# EAGLE board ONLY_HBRIDGE_v7 (EAGLE 9.7.0)
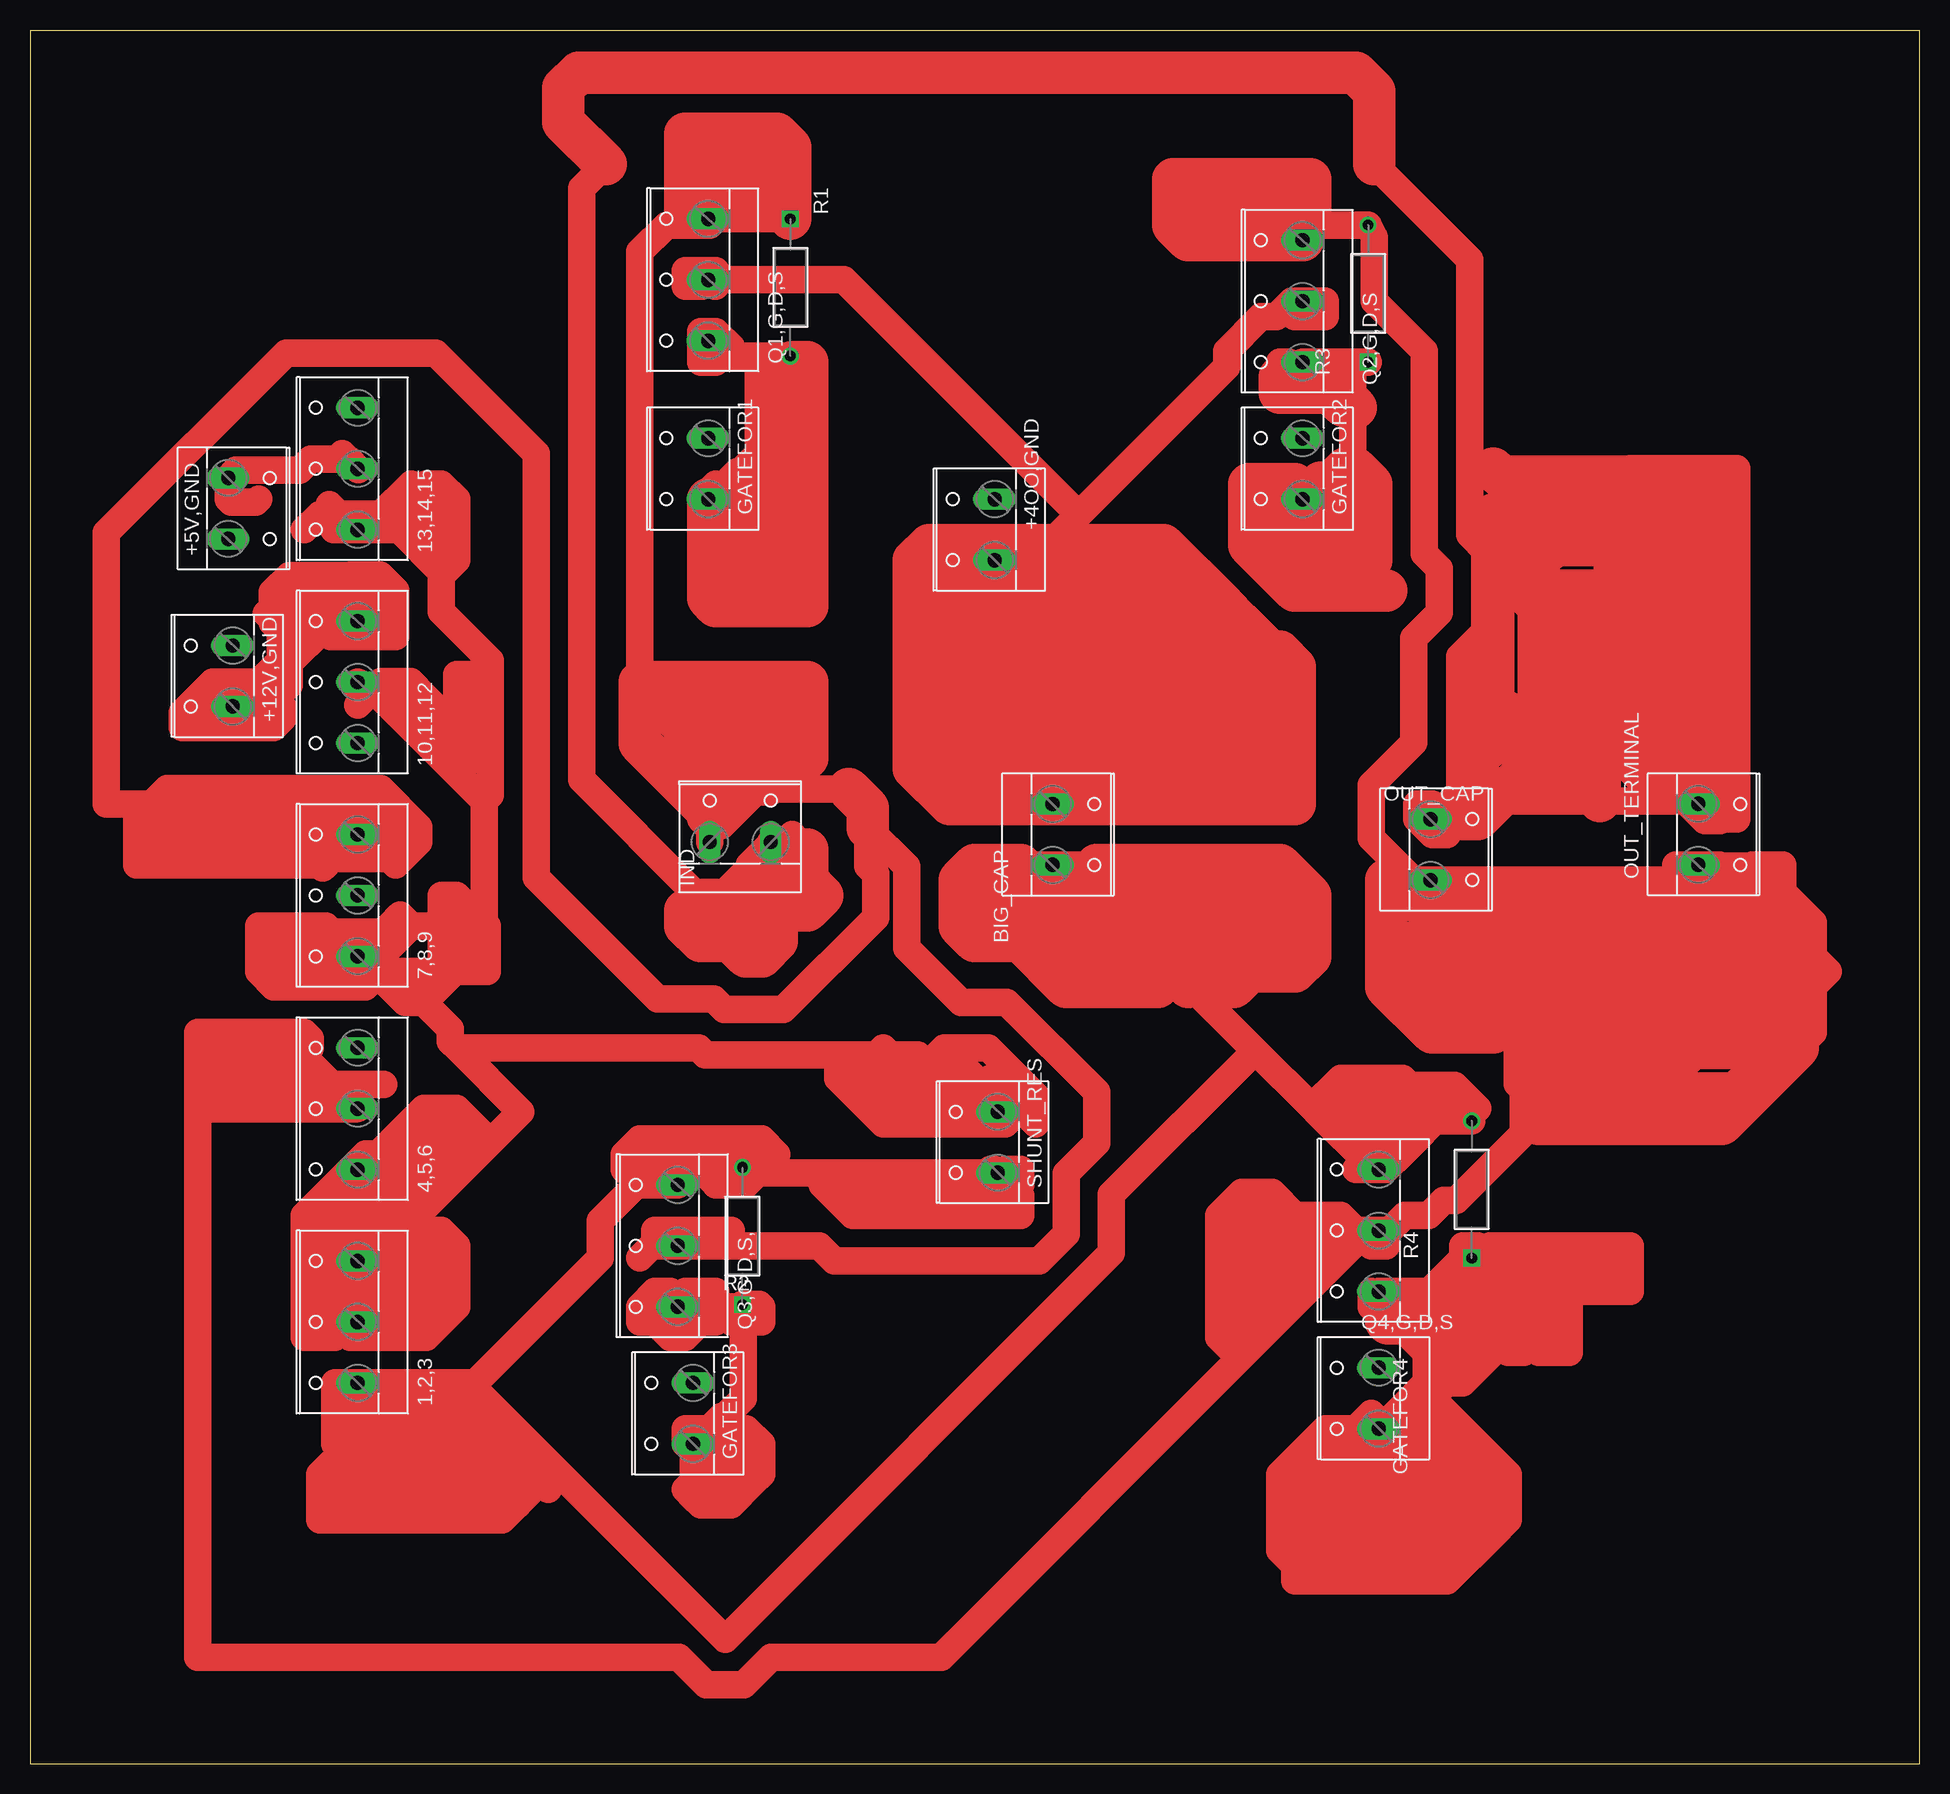
[diagram p0: board, top side]

Size 157.46 x 144.45 mm. Coordinates in mm from the lower left corner, seen from the top.
Outline: 0,0 157.46,0 157.46,144.45 0,144.45 0,0
Copper layers (1*16): Top 0.035mm / dielectric 1.5mm / Bottom 0.035mm
Design rules "Fusion Electronics Design Rules": minimum track width 90mil, minimum drill 0.35mm, track to track 0.5mm, track to pad 40mil, pad to pad 6mil, via to via 6mil, smd to smd 6mil, copper to edge 40mil, drill to drill 6mil, minimum pad ring 10mil, minimum via ring 8mil, stop-mask expansion 4mil, vias tented up to drill 9999mil, thermal gap 10mil

## Footprints (pad centres in the part's own frame; a part is rotated, then mirrored left to right if it is on the bottom)
W237-133 = drill 1.194 long: 1 -5.08,-0.635; 2 0,-0.635; 3 5.08,-0.635
W237-132 = drill 1.194 long: 1 -2.54,-0.635; 2 2.54,-0.635
STA_CF14_STP = drill 0.889 pad 1.397 square: 1 0,0 | drill 0.889 pad 1.397: 2 11.43,0

## Placement (x,y rotation side)
1,2,3  [W237-133]  26.67,36.83 90 top
4,5,6  [W237-133]  26.67,54.61 90 top
7,8,9  [W237-133]  26.67,72.39 90 top
10,11,12  [W237-133]  26.67,90.17 90 top
13,14,15  [W237-133]  26.67,107.95 90 top
+4OO,GND  [W237-132]  79.76,102.87 90 top
+5V,GND  [W237-132]  17.15,104.65 270 top
+12V,GND  [W237-132]  16.26,90.68 90 top
BIG_CAP  [W237-132]  85.85,77.47 270 top
GATEFOR1  [W237-132]  55.88,107.95 90 top
GATEFOR2  [W237-132]  105.41,107.95 90 top
GATEFOR3  [W237-132]  54.62,29.21 90 top
GATEFOR4  [W237-132]  111.76,30.48 90 top
IND  [W237-132]  59.18,77.47 0 top
OUT_CAP  [W237-132]  117.35,76.2 270 top
OUT_TERMINAL  [W237-132]  139.66,77.48 270 top
Q1,G,D,S  [W237-133]  55.88,123.7 90 top
Q2,G,D,S  [W237-133]  105.41,121.92 90 top
Q3,G,D,S,  [W237-133]  53.34,43.18 90 top
Q4,G,D,S  [W237-133]  111.76,44.45 90 top
R1  CF14JT10K0STA_CF14_STP  [STA_CF14_STP]  63.36,128.78 270 top
R2  CF14JT10K0STA_CF14_STP  [STA_CF14_STP]  59.37,38.28 90 top
R3  CF14JT10K0STA_CF14_STP  [STA_CF14_STP]  111.51,116.84 90 top
R4  CF14JT10K0STA_CF14_STP  [STA_CF14_STP]  120.14,42.16 90 top
SHUNT_RES  [W237-132]  80.01,51.82 90 top

## Library data of the parts
1,2,3 4,5,6 7,8,9 10,11,12 13,14,15 +4OO,GND +5V,GND +12V,GND BIG_CAP GATEFOR1-GATEFOR4 IND OUT_CAP OUT_TERMINAL Q1,G,D,S Q2,G,D,S Q3,G,D,S, Q4,G,D,S SHUNT_RES = con-wago-508
R1-R4 = 2024-12-04_14-13-54_Library; COPYRIGHT: Copyright (C) 2024 Ultra Librarian. All rights reserved.; MANUFACTURER_PART_NUMBER: CF14JT10K0; MFR_NAME: Stackpole International

## Nets
N$2: GATEFOR2.1 Q2,G,D,S.1 R3.1
N$3: 1,2,3.2 4,5,6.1 7,8,9.1 10,11,12.2 13,14,15.1 SHUNT_RES.2
N$5: GATEFOR3.1 Q3,G,D,S,.1 R2.1
N$6: 1,2,3.1 BIG_CAP.2 Q3,G,D,S,.3 Q4,G,D,S.3 R2.2 R4.2 SHUNT_RES.1
N$7: 13,14,15.2 +5V,GND.1
N$8: 10,11,12.3 +12V,GND.1
N$9: +4OO,GND.1 BIG_CAP.1 Q1,G,D,S.2 Q2,G,D,S.2
N$11: IND.2 OUT_CAP.1 OUT_TERMINAL.1
N$12: 4,5,6.2 OUT_CAP.2 OUT_TERMINAL.2 Q2,G,D,S.3 Q4,G,D,S.2 R3.2
N$13: GATEFOR1.1 Q1,G,D,S.1 R1.2
N$17: 7,8,9.3 IND.1 Q1,G,D,S.3 Q3,G,D,S,.2 R1.1
N$19: GATEFOR4.1 Q4,G,D,S.1 R4.1

## Tracks (layer width: path | path; a pad name or v marks a point on that pad's centre or on a via)
N$2
  Top 2.286: 110.24,116.84 Q2,G,D,S.1 106.68,116.2 106.68,115.57 105.41,115.57 104.77,116.2 104.14,116.84 104.77,116.84 | 110.24,116.84 R3.1 | 110.24,116.84 110.24,109.22 108.71,107.7 108.46,107.7 106.17,105.41 GATEFOR2.1 | 106.68,104.14 105.41,104.14 105.41,106.68
  Top 3.556: 106.68,104.14 106.68,100.33 107.95,99.06 110.49,99.06 111.76,100.33 111.76,106.68 110.49,107.95 109.62,107.95 108.47,106.8 107.56,106.8 106.17,105.41 | 105.41,106.68 101.6,106.68 101.6,101.6 104.14,99.06 | 104.14,99.06 105.41,100.33 105.41,101.6 104.14,102.87 104.14,104.14 105.41,105.41 110.49,105.41 110.49,101.6 109.22,100.33 107.95,100.33 107.95,102.87 | 104.14,99.06 105.41,97.79 113.03,97.79 | 104.77,116.2 104.14,115.57 104.14,114.3 108.35,114.3 109.42,113.23 109.85,113.67 110.49,113.03
N$3
  Top 2.286: 38.35,91.95 37.85,92.46 | 29.72,39.12 27.43,36.83 1,2,3.2 27.94,36.83 27.94,35.56 | 29.72,39.12 29.97,39.12 31.5,40.64 31.5,45.47 | 27.69,49.28 27.43,49.53 4,5,6.1 | 27.69,49.28 31.5,45.47 | 31.5,45.47 32.51,45.97 40.89,54.36 35.58,59.67 | 30.73,64.01 28.96,65.79 | 28.96,65.79 27.43,67.31 | 29.84,88.27 28.45,89.66 10,11,12.2 27.3,89.54 27.94,88.9 | 29.84,88.27 35.56,82.55 | 35.56,82.55 37.85,80.26 | 31.5,66.04 31.5,64.77 30.73,64.01 | 37.85,80.26 37.85,66.04 31.5,66.04 | 27.94,88.9 27.3,88.27 | 27.43,67.31 7,8,9.1 26.04,66.04 21.59,66.04 | 27.94,67.31 27.43,67.31 | 27.94,67.31 27.94,68.58 26.67,68.58 25.4,67.31 26.67,67.31 28.7,69.34 | 27.69,49.28 26.67,48.26 26.04,48.89 | 26.04,48.89 27.96,50.82 29.01,50.82 32.79,54.61 35.56,54.61 38.1,52.07 36.83,52.07 35.56,53.34 33.02,53.34 29.21,49.53 31.11,47.62 32.39,47.62 35.56,50.8 34.29,52.07 33.02,52.07 31.75,50.8 31.75,49.53 33.02,49.53 34.29,50.8 | 27.94,35.56 26.67,35.56 26.67,38.1 24.13,38.1 24.13,36.83 25.4,36.83 25.4,35.56 22.86,35.56 22.86,45.72 26.04,48.89 | SHUNT_RES.2 80.64,55.24 77.47,58.42 74.93,58.42 76.2,59.69 79.83,59.69 82.96,56.56 | 82.55,54.61 81.28,53.34 79.76,53.34 | 27.94,35.56 33.02,35.56 35.56,38.1 35.56,43.18 34.29,44.45 29.98,44.45 | 24.64,44.96 22.86,43.18 23.36,42.68 23.36,40.64 25.14,38.86 29.47,38.86 31.25,40.64 31.25,41.91 | 24.64,44.96 29.47,44.96 31.25,43.17 31.25,41.91 | 24.64,44.96 24.64,44.46 23.36,43.17 23.36,41.91 | 29.72,39.12 28.19,40.64 | 28.19,40.64 26.67,40.64 | 26.67,40.64 25.4,40.64 25.4,43.18 29.21,43.18 | 29.21,43.18 29.21,40.64 28.19,40.64 | 26.67,40.64 27.94,41.91 | 29.21,43.18 34.29,43.18 34.29,39.37 33.02,38.1
  Top 2.286: 33.02,38.1 31.75,36.83 | 31.75,36.83 29.21,36.83 29.21,38.1 30.48,39.37 33.02,39.37 | 33.02,39.37 33.02,38.1 | 33.02,39.37 33.02,41.91 31.25,41.91 | 31.75,36.83 30.48,38.1 | 24.64,44.96 26.67,46.99 27.94,46.99 29.21,45.72 | 32.82,63.48 35.04,61.26 35.04,60.21 35.58,59.67 | 32.82,63.48 31.27,63.48 30.73,64.01 | 28.7,69.34 29.47,69.34 29.98,69.85 | 29.98,69.85 30.86,70.73 31.75,69.85 29.21,67.31 27.94,67.31 | 31.5,66.04 29.21,66.04 | 32.82,63.48 35.39,66.04 | 36.83,66.04 38.1,66.04 38.1,67.31 | 36.83,66.04 35.39,66.04 | 38.1,67.31 38.1,69.85 35.56,72.39 34.29,72.39 34.29,67.14 35.39,66.04 | 36.83,66.04 35.56,67.31 35.56,69.85 34.29,71.12 | 38.1,67.31 36.83,68.58 36.83,69.85 29.98,69.85 | 28.7,69.34 25.14,69.34 24.63,69.85 19.05,69.85 19.05,66.04 20.32,64.77 27.94,64.77 28.96,65.79 | 21.59,66.04 20.32,67.31 20.32,68.58 22.86,68.58 24.13,67.31 23.5,66.67 | 21.59,66.04 21.59,67.31 | 38.35,91.95 37.21,90.81 35.56,90.81 35.56,85.09 34.29,86.36 | 29.84,88.27 30.48,88.9 31.75,88.9 | 31.75,88.9 33.02,88.9 | 33.02,88.9 34.29,87.63 34.29,86.36 | 34.29,86.36 33.02,86.36 31.75,87.63 31.75,88.9 | 37.85,80.26 38.35,80.77 38.35,91.95 | 37.85,92.46 37.85,84.84 35.56,82.55 | 27.94,88.9 29.23,90.19 31.73,90.19 33.02,88.9 | 37.85,92.46 34.27,96.04 34.27,99.04 | 34.27,99.04 34.27,99.36 30.75,102.87 13,14,15.1 25.4,102.87 25.4,104.5 | 34.27,99.04 35.56,100.33 35.56,105.41 34.29,106.68 33,106.68 33,105.11 30.78,102.89 26.88,102.89 25.73,104.05 25.31,104.05 25.31,102.87 | 25.4,104.5 24.95,104.95 | 25.4,104.5 25.74,104.16 29.23,104.16 31.75,106.68 34.29,104.14 34.29,101.6 33.02,101.6 33.02,102.87 31.75,104.14 24.13,104.14 22.86,102.87
  Top 2.286: 79.76,53.34 71.12,53.34 67.31,57.15 67.31,58.42 68.58,58.42 69.85,57.15 69.85,55.88 71.12,55.88 72.39,54.61 77.47,54.61 77.47,57.15 74.93,57.15 73.66,55.88 72.39,55.88 69.85,58.42 71.12,59.69 74.93,55.88 76.2,55.88 | 82.55,54.61 83.82,53.34 83.82,55.7 82.96,56.56 | 82.55,54.61 80.01,57.15 82.37,57.15 82.96,56.56 | 82.55,54.61 82.55,56.97 82.46,57.06 | 82.55,54.61 82.96,55.02 82.96,56.56 | 35.58,59.67 55.73,59.67 56.29,59.1 73.99,59.1 79.76,53.34
N$5
  Top 2.286: Q3,G,D,S,.1 59.18,38.1 | 59.18,38.1 R2.1 60.78,38.28 60.96,38.1 60.96,36.83 58.42,36.83 58.67,37.08 59.44,37.08 | 59.44,37.08 59.44,30.48 57.91,28.96 57.66,28.96 55.37,26.67 GATEFOR3.1 | 59.44,37.08 59.18,38.1 | 55.88,27.94 54.61,27.94 54.61,26.67 GATEFOR3.1 | Q3,G,D,S,.1 54.61,37.46 53.97,37.46 53.32,38.12 51.44,38.12 | Q3,G,D,S,.1 54.11,38.24 54.11,38.6 | GATEFOR3.1 55.25,23.5 54.61,22.86 55.25,22.23 | 55.25,22.23 55.88,21.59 58.42,21.59 | 58.42,21.59 60.33,23.5 | 60.33,23.5 60.96,24.13 60.96,26.67 59.69,27.94 57.15,27.94 57.15,26.67 | 57.15,24.13 57.15,26.67 | 57.15,24.13 58.42,24.13 58.42,26.67 57.15,26.67 | Q3,G,D,S,.1 53.97,38.73 53.34,39.37 52.07,39.37 50.8,38.1 50.8,36.83 52.07,36.83 53.34,35.56 54.61,35.56 55.88,36.83 57.15,36.83 57.15,39.37 54.61,39.37 | 55.25,22.23 57.15,24.13 | 58.42,21.59 58.42,22.86 | 60.33,23.5 59.69,24.13 59.69,25.4
N$6
  Top 2.286: R4.2 116.59,53.59 112.52,49.53 Q4,G,D,S.3 | 107.44,54.1 111.51,50.04 Q4,G,D,S.3 | 107.44,54.1 106.81,54.74 | 106.81,54.74 102.11,59.44 | 92.84,68.71 102.11,59.44 | 55.88,49.53 55.37,49.53 54.36,48.51 53.34,49.53 | 55.88,49.53 58.42,49.53 | 58.42,49.53 59.18,49.53 | 37.08,31.75 1,2,3.1 27.94,31.12 27.94,30.48 25.4,30.48 | SHUNT_RES.1 60.2,49.28 59.18,49.53 | 25.4,30.48 25.4,31.75 27.94,31.75 29.21,30.48 | 37.08,31.75 36.82,31.49 57.92,10.38 90.12,42.58 90.12,47.45 102.11,59.44 | 53.34,49.53 53.97,50.16 | 53.34,49.53 52.07,49.53 53.34,48.26 Q3,G,D,S,.3 53.95,48.24 50.82,48.24 | R2.2 60.78,49.71 59.83,48.77 58.42,48.77 59.18,49.53 | 88.9,74.93 BIG_CAP.2 82.55,74.93 | SHUNT_RES.1 80.39,49.53 80.01,49.53 | 80.01,48.26 82.55,48.26 82.55,49.53 81.28,49.53 81.28,46.99 73.66,46.99 | Q4,G,D,S.3 111.76,50.16 111.76,50.8 113.03,52.07 114.3,50.8 | R4.2 120.14,54.1 120.65,54.61 119.38,55.88 | 119.38,55.88 118.74,55.24 118.74,54.99 R4.2 | 106.81,54.74 109.22,57.15 113.03,57.15 | 107.44,54.1 109.22,55.88 110.49,55.88 111.76,54.61 115.57,54.61 114.3,53.34 111.76,53.34 111.76,52.07 110.49,52.07 109.22,53.34 113.03,57.15 | 113.03,57.15 114.3,55.88 118.11,55.88 118.11,54.61 114.3,50.8 | 114.3,50.8 113.03,49.53 110.49,49.53 | 25.4,30.48 25.4,26.67 26.67,26.67 26.67,29.21 36.83,29.21 36.83,30.48 30.48,30.48 27.94,27.94 | 27.94,27.94 27.94,26.67 38.1,26.67 38.1,27.94 27.94,27.94 | 27.94,27.94 24.13,24.13 24.13,20.32 39.37,20.32 41.91,22.86 40.64,24.13 39.37,24.13 39.37,22.86 40.64,21.59 38.1,21.59 | 43.18,22.86 39.37,26.67 36.83,24.13 26.67,24.13 25.4,22.86 25.4,21.59 38.1,21.59 | 38.1,21.59 38.1,22.86 26.67,22.86 26.67,25.4 36.83,25.4
  Top 2.286: 37.08,31.75 47.51,42.18 47.51,45.25 50.5,48.24 50.82,48.24 | 50.82,48.24 49.53,49.53 49.53,50.8 | 58.42,49.53 58.42,50.8 52.07,50.8 50.8,49.53 49.53,50.8 | 49.53,50.8 50.8,52.07 60.96,52.07 62.23,50.8 | 62.23,50.8 59.69,50.8 57.15,48.26 | 55.88,49.53 57.17,48.24 59.67,48.24 62.23,50.8 | SHUNT_RES.1 82.55,47.37 82.55,45.72 73.66,45.72 | 73.66,45.72 73.66,46.99 | 73.66,45.72 68.58,45.72 66.04,48.26 66.67,48.89 67.94,48.89 69.85,46.99 72.39,46.99 | 73.66,46.99 72.39,48.26 | 113.03,57.15 114.4,57.15 115.01,56.54 118.72,56.54 119.38,55.88
  Top 3.556: 82.55,74.93 78.74,74.93 77.47,73.66 77.47,69.85 78.74,68.58 82.55,68.58 | 90.17,68.58 92.71,68.58 92.84,68.71 | 90.17,68.58 82.55,68.58 | 96.52,64.77 97.79,66.04 88.9,74.93 104.14,74.93 106.68,72.39 106.68,67.31 105.41,66.04 101.6,66.04 100.33,64.77 95.25,69.85 95.25,71.12 93.98,72.39 95.25,73.66 99.06,73.66 101.6,71.12 102.87,71.12 102.87,72.39 105.41,72.39 105.41,68.58 104.14,67.31 102.87,68.58 101.6,67.31 97.79,71.12 | 90.17,68.58 87.63,71.12 85.09,71.12 | 83.82,71.12 80.01,71.12 80.01,72.39 82.55,72.39 83.82,71.12 | 83.82,71.12 85.09,71.12 | 85.09,71.12 86.36,72.39 87.63,72.39 87.63,73.66 83.82,73.66 | 82.55,68.58 86.36,64.77 93.98,64.77 93.98,67.31 87.63,67.31
N$7  (1 unrouted)
  Top 2.286: 19.05,105.41 18.8,105.16 16.76,105.16 16.51,105.41 16.52,105.42 +5V,GND.1 17.16,107.83 22.47,107.83 23.38,108.74 26.51,108.74 27.36,107.9 | 13,14,15.2 26.04,109.22
N$8
  Top 2.286: 26.29,94.62 26.04,94.62 25.4,95.25 26.67,96.52 27.3,95.89 10,11,12.3 29.21,95.25 29.21,96.52 26.67,99.06 | 26.29,94.62 26.92,95.25 | +12V,GND.1 16.51,87.76 | 16.51,87.76 16.51,87.63 | 16.51,87.63 15.24,87.63 15.24,88.9 16.51,88.9 | 16.51,88.9 17.78,88.9 17.78,87.63 | 16.51,87.63 17.78,87.63 | 16.51,88.52 16.51,87.76 | 16.51,88.9 16.51,88.52 | 16.51,88.52 +12V,GND.1 | +12V,GND.1 17.27,88.14 17.78,87.63 | 26.29,94.62 26.27,94.59 24.47,94.59 | 24.47,94.59 21.61,91.74 21.61,89.94 19.81,88.14 21.08,88.14 21.08,87.12 20.32,86.36 12.7,86.36 12.7,87.63 15.23,90.16 18.92,90.16 | +12V,GND.1 18.92,90.16 | 18.92,90.16 19.05,90.16 20.84,91.95 20.84,94.48 20.2,95.13 20.2,97.67 21.59,99.06 24.13,99.06 | 24.13,99.06 25.4,97.79 25.4,96.52 24.13,96.52 21.59,93.98 19.69,95.89 21.59,97.79 22.86,97.79 22.86,96.52 21.59,96.52 | 26.67,99.06 24.13,99.06 | 24.47,94.59 25.08,93.98 30.48,93.98 30.48,97.79 29.19,99.08 26.67,99.08 26.67,99.06
N$9
  Top 2.286: 82.04,98.81 80.52,100.33 81.28,100.33 80.01,101.6 78.74,100.33 78.74,99.06 80.01,99.06 80.01,99.95 +4OO,GND.1 | 82.04,98.81 85.09,95.76 85.09,80.01 BIG_CAP.1 | 82.04,98.81 87.38,104.14 | Q1,G,D,S.2 67.82,123.7 87.38,104.14 | Q1,G,D,S.2 57.05,123.17 57.15,123.17 | Q1,G,D,S.2 56.01,123.19 54.61,123.19 54.61,124.46 57.15,124.46 | BIG_CAP.1 83.82,80.01 | BIG_CAP.1 87.63,80.01 87.63,81.28 82.55,81.28 82.55,80.01 | 105.41,120.65 107.95,120.65 107.95,121.92 Q2,G,D,S.2 105.16,121.92 103.86,120.63 102.57,120.63 99.72,117.77 99.72,116.48 87.38,104.14
  Top 3.556: 73.66,95.25 99.06,95.25 102.87,91.44 | 102.87,91.44 102.87,81.28 88.9,81.28 87.63,82.55 87.63,87.63 86.36,88.9 86.36,91.44 87.63,92.71 95.25,92.71 96.52,91.44 97.79,92.71 100.33,90.17 100.33,83.82 95.25,83.82 93.98,82.55 92.71,82.55 91.44,83.82 90.17,83.82 90.17,87.63 88.9,88.9 88.9,91.44 95.25,91.44 97.79,88.9 97.79,87.63 96.52,86.36 98.42,84.45 96.52,82.55 91.44,87.63 91.44,88.9 93.98,88.9 95.25,87.63 95.25,86.36 91.44,82.55 81.28,82.55 80.01,81.28 78.74,81.28 76.2,83.82 76.2,88.9 74.93,90.17 74.93,92.71 82.55,92.71 82.55,86.36 83.82,85.09 82.55,83.82 80.01,83.82 77.47,86.36 77.47,90.17 80.01,90.17 80.01,86.36 | 73.66,95.25 73.66,100.33 | 73.66,100.33 74.93,101.6 94.45,101.6 99.51,96.54 | 104.14,92.71 104.14,88.9 | 73.66,100.33 76.2,100.33 77.47,99.06 76.2,97.79 78.1,95.89 80.01,97.79 97.79,97.79 99.06,96.52 | 104.14,92.71 105.41,91.44 105.41,80.01 82.55,80.01 76.63,80.01 73.66,82.98 73.66,95.25 | 99.51,96.54 97.24,98.81 82.04,98.81 | 100.78,95.27 99.51,96.54 | 99.51,96.54 100.78,95.27 | 102.87,91.44 102.87,93.18 100.78,95.27 | 104.14,92.71 104.12,92.73 103.32,92.73 100.78,95.27
N$11
  Top 2.286: 119.13,81.03 117.47,79.38 116.84,80.01 115.57,80.01 115.57,78.74 116.84,77.47 118.11,77.47 118.11,78.74 OUT_CAP.1 | 138.94,80.26 135.89,80.26 | 135.89,80.26 130.81,80.26 119.89,80.26 119.13,81.03 | 63.5,77.47 63.5,74.93 62.23,74.93 62.23,76.2 62.23,76.33 IND.2 61.72,76.71 59.94,74.93 59.94,74.68 57.91,72.64 55.37,72.64 45.97,82.04 45.97,131.34 47.96,133.33 | OUT_TERMINAL.1 139.02,80.69 138.43,81.28 139.06,81.92 139.06,80.39 138.94,80.26 | 138.94,80.26 138.43,79.76 139.57,78.61 140.84,78.61 140.97,78.74 142.24,78.74 142.24,106.68 | 135.89,80.26 133.35,82.8 133.35,95.25 133.35,101.6 133.35,104.14 133.35,106.68 134.62,106.68 134.62,105.41 | 134.62,105.41 134.62,82.55 135.89,82.55 135.89,104.14 137.16,105.41 137.16,81.53 | 137.16,81.53 138.43,82.8 138.43,102.87 139.7,104.14 139.7,80.01 140.97,80.01 140.97,105.41 135.89,105.41 | 137.16,81.53 135.89,80.26 | 134.62,105.41 133.35,105.41 | 142.24,106.68 142.24,107.95 137.16,107.95 | 135.89,107.95 133.35,107.95 132.72,107.31 132.08,106.68 136.53,102.23 137.8,102.23 142.24,106.68 | 135.89,107.95 137.16,107.95 | 137.16,107.95 138.43,106.68 140.97,106.68 | 135.89,107.95 137.16,106.68 135.89,105.41 | 135.89,105.41 134.62,105.41 | 112.04,133.33 119.97,125.4 119.97,102.46 121.24,101.19 121.24,94.39 119.13,92.28 119.13,81.03
  Top 3.556: 62.23,76.2 64.77,76.2 64.77,73.66 66.04,72.39 64.77,71.12 62.23,71.12 62.23,72.39 60.96,73.66 58.42,71.12 58.42,68.58 55.88,68.58 54.61,69.85 54.61,71.12 55.88,71.12 59.69,67.31 60.96,67.31 62.23,68.58 62.23,69.85 60.96,69.85 60.96,68.58 | 47.96,133.33 44.45,136.84 44.45,139.7 45.72,140.97 110.49,140.97 112.04,139.42 112.04,133.33 | 118.11,78.74 120.65,78.74 125.73,83.82 125.73,96.52 | 125.73,96.52 123.19,99.06 | 123.19,99.06 121.92,97.79 121.92,88.9 120.65,87.63 120.65,83.82 | 120.65,83.82 120.65,81.03 119.89,80.26 | 120.65,83.82 121.92,85.09 123.19,85.09 123.19,87.63 | 132.72,107.31 122.55,107.31 121.92,107.95 | 133.35,104.14 121.92,104.14 121.92,100.33 123.19,99.06 | 133.35,101.6 132.08,101.6 | 127,101.6 123.19,101.6 123.19,97.79 128.27,97.79 | 128.27,97.79 132.08,97.79 132.08,101.6 | 127,101.6 132.08,101.6 | 127,101.6 125.73,100.33 125.73,96.52 | 133.35,95.25 128.27,95.25 | 128.27,97.79 128.27,82.55 127,81.28 | 130.81,80.26 130.81,93.98 132.08,93.98
N$12
  Top 2.286: Q2,G,D,S.3 106.17,127 107.44,128.27 R3.2 112.01,127.25 112.01,121.92 116.18,117.75 116.18,100.89 117.45,99.62 117.45,95.96 115.32,93.82 115.32,85.11 111.78,81.58 111.78,77.17 115.27,73.68 116.69,73.68 OUT_CAP.2 | 123.95,73.66 137.67,73.66 138.94,74.93 OUT_TERMINAL.2 | 123.95,73.66 OUT_CAP.2 | 27.18,54.61 4,5,6.2 27.3,56 27.94,56.64 | 27.18,54.61 25.4,54.61 25.4,55.88 25.91,55.88 27.18,54.61 | 13.99,54.59 27.15,54.59 27.18,54.61 | 13.99,54.59 13.99,8.89 54.06,8.89 56.35,6.6 59.49,6.6 61.78,8.89 75.93,8.89 100.83,33.79 | 106.68,129.54 107.31,128.91 | OUT_CAP.2 116.84,73.53 116.84,72.39 | 115.57,72.39 115.57,71.12 118.11,71.12 118.11,72.39 | Q4,G,D,S.2 112.42,44.47 113.33,44.47 114.57,45.72 116.57,45.72 117.81,46.97 118.87,46.97 124.44,52.53 124.44,56.18 123.95,56.66 123.95,73.66 | Q4,G,D,S.2 113.03,43.81 113.03,43.18 111.76,43.18 110.49,44.45 | 110.49,44.45 Q4,G,D,S.2 | Q4,G,D,S.2 111.49,44.45 103.37,36.33 | 103.37,36.33 100.83,33.79 | OUT_TERMINAL.2 137.16,74.93 | 138.43,73.66 139.7,73.66 | OUT_TERMINAL.2 136.82,72.73 | 136.82,72.73 136.18,72.1 | 136.18,72.1 135.89,71.81 135.89,67.31 | 135.89,67.31 135.89,63.5 137.8,61.59 | 139.7,59.69 140.97,59.69 | 140.97,59.69 147.32,59.69 148.59,60.96 148.59,70.12 143.89,74.83 140.87,74.83 140.75,74.94 OUT_TERMINAL.2 | 136.82,72.73 138.43,71.12 138.43,62.23 142.24,62.23 | 142.24,62.23 142.24,73.66 | 139.7,73.66 139.7,72.39 | 139.7,72.39 139.7,63.5 143.51,63.5 | 143.51,63.5 144.78,63.5 | 144.78,63.5 147.32,63.5 147.32,68.58 | 147.32,68.58 146.05,69.85 | 146.05,69.85 146.05,74.93 143.51,74.93 143.51,72.39 144.78,71.12 144.78,69.85 143.51,68.58 143.51,67.31 144.78,67.31 144.78,63.5
  Top 2.286: 144.78,63.5 147.32,60.96 | 142.24,62.23 143.51,62.23 144.78,60.96 149.86,66.04 147.32,68.58 | 135.89,67.31 137.16,66.04 | 137.16,66.04 137.16,64.77 | 136.18,72.1 137.16,71.12 137.16,66.04 | 137.16,66.04 142.24,60.96 | 142.24,60.96 140.97,59.69 | 146.05,69.85 146.05,64.77 142.24,60.96 | 139.7,72.39 139.06,71.76 139.06,69.22 140.97,67.31 140.97,64.77 | 139.7,72.39 140.97,71.12 140.97,62.23 139.7,60.96 142.24,60.96 | 143.51,63.5 143.51,72.18 141.5,74.19 141.5,72.92 140.97,72.39 139.7,73.66 | 103.37,36.33 101.6,38.1 | 101.6,43.18 100.33,41.91 100.33,40.64 102.87,40.64 102.87,41.91 105.41,41.91 105.41,39.37 104.14,38.1 102.87,38.1 | 101.6,43.18 109.22,43.18 | 101.6,38.1 104.14,40.64 105.41,40.64 106.68,41.91 | 102.87,38.1 101.6,38.1 | 101.6,43.18 99.06,45.72 | 99.06,45.72 100.97,47.62 103.5,47.62 105.41,45.72 107.95,45.72 | 107.95,45.72 109.22,45.72 110.49,44.45 | 107.95,45.72 106.68,44.45 102.87,44.45 101.6,45.72 102.87,46.99 105.41,44.45 109.22,44.45 | 100.83,33.79 99.69,34.92 | 99.69,34.92 99.06,35.56 99.06,45.72 | 99.69,34.92 99.69,38.73 100.33,39.37 101.6,39.37 101.6,35.56 102.87,36.83 102.87,38.1 | 24.38,57.4 25.14,56.64 27.94,56.64 | 24.38,57.4 22.86,55.88 21.59,55.88 21.59,57.15 22.48,58.03 23.75,58.03 | 23.75,58.03 24.38,57.4 | 27.94,56.64 29.47,56.64 | 13.99,54.59 13.99,57.15 | 13.99,57.15 13.99,58.4 13.97,58.42 23.36,58.42 23.75,58.03 | 13.99,57.15 20.32,57.15 20.32,55.88 15.24,55.88 13.97,57.15 13.97,60.96 22.86,60.96 23.36,60.46 23.36,59.69 15.24,59.69
  Top 3.556: Q2,G,D,S.3 96.52,127 95.25,128.27 95.25,132.08 106.68,132.08 106.68,129.54 97.79,129.54 | 147.32,59.69 140.97,53.34 125.73,53.34 125.73,72.39 128.27,72.39 128.27,54.61 132.08,54.61 132.08,55.88 130.81,57.15 130.81,71.12 132.08,72.39 133.35,72.39 133.35,57.15 134.62,55.88 142.24,55.88 144.78,58.42 143.51,59.69 139.7,59.69 138.43,59.69 135.89,57.15 133.99,59.05 133.99,61.59 134.62,62.23 135.89,60.96 137.16,60.96 137.8,61.59 | 115.57,72.39 114.3,73.66 113.03,73.66 113.03,64.77 116.84,60.96 121.92,60.96 121.92,72.39 116.84,72.39 | 118.11,71.12 119.38,69.85 119.38,62.23 116.84,62.23 115.57,63.5 115.57,68.58 116.84,68.58 116.84,64.77
N$13
  Top 2.286: 60.71,117.35 57.91,117.35 56.64,118.62 Q1,G,D,S.1 55.88,117.98 55.88,116.84 57.15,116.84 58.42,118.11 57.15,119.38 55.88,119.38 55.88,118.11 | 60.71,117.35 R1.2 | 60.71,117.35 60.71,109.22 59.18,107.7 58.93,107.7 56.64,105.41 GATEFOR1.1 57.15,104.78 | 57.15,104.78 57.15,104.14 | 57.15,104.14 58.42,104.14 58.42,105.41 57.15,106.68 55.88,105.41 55.88,104.14 57.15,104.14 | 57.15,104.78 57.15,105.41
  Top 3.556: GATEFOR1.1 56.52,97.16 57.15,96.52 62.23,96.52 | 62.23,96.52 62.23,106.68 | 62.23,106.68 60.96,106.68 59.69,105.41 59.69,99.06 62.23,96.52 | 62.23,96.52 64.77,96.52 64.77,116.84 63.5,116.84 62.23,115.57 62.23,106.68
N$17
  Top 2.286: Q1,G,D,S.3 57.15,128.78 | 57.15,128.78 R1.1 | 60.45,81.03 57.66,78.23 56.52,79.38 55.88,78.74 56.64,77.98 IND.1 | 60.45,81.03 59.94,82.04 50.82,91.16 50.82,126.03 53.04,128.25 54.59,128.25 54.61,128.27 | 7,8,9.3 26.67,78.11 26.67,78.74 27.94,78.74 27.94,77.47 26.67,76.2 26.04,76.84 26.67,77.47 | 26.67,77.47 7,8,9.3 | 60.45,81.03 61.7,81.03 61.93,81.26 68.23,81.26 68.56,81.58 | Q1,G,D,S.3 55.75,129.54 54.61,129.54 54.61,128.27 | 57.15,128.78 56.64,128.27 54.61,128.27 | Q1,G,D,S.3 57.15,129.41 57.15,129.54 | 7,8,9.3 25.28,75.44 | 25.28,75.44 25.14,75.44 24.38,74.68 | 25.28,75.44 29.97,75.44 30.48,74.93 32.39,76.84 32.39,78.11 29.21,81.28 11.43,81.28 8.89,78.74 8.89,74.93 24.13,74.93 24.13,76.2 11.43,76.2 10.16,77.47 10.16,78.74 11.43,80.01 13.97,80.01 15.24,78.74 16.51,78.74 17.78,77.47 | 17.78,77.47 15.88,75.56 14.61,75.56 11.43,78.74 12.06,79.38 13.34,79.38 15.24,77.47 17.14,79.38 20.95,79.38 21.59,78.74 22.86,78.74 24.13,80.01 25.4,80.01 25.4,78.74 26.67,77.47 | 7,8,9.3 30.48,77.47 30.48,78.74 29.21,80.01 6.37,80.01 6.37,102.64 21.34,117.6 33.8,117.6 42.19,109.22 42.19,73.89 52.32,63.75 56.99,63.75 57.86,62.89 62.79,62.89 70.46,70.56 70.46,74.22 69.83,74.86 69.83,78 | 17.78,77.47 24.13,77.47 24.13,78.74 17.78,78.74 | 51.8,43.18 Q3,G,D,S,.2 65.77,43.18 67.01,41.93 84.12,41.93 86.34,44.15 86.34,49.23 88.88,51.77 88.88,56 81.4,63.48 77.59,63.48 73.05,68.02 73.05,74.78 69.83,78 | 51.8,43.18 52.07,43.45 52.07,44.45 58.42,44.45 | 51.8,43.18 50.8,42.18 | 69.83,78 69.47,78.36
  Top 3.556: 56.52,79.38 50.8,85.09 50.8,90.17 64.77,90.17 64.77,83.82 63.5,82.55 62.23,82.55 62.23,87.63 55.88,87.63 55.88,86.36 59.69,86.36 59.69,83.82 58.42,82.55 58.42,81.28 57.15,81.28 54.61,83.82 54.61,86.36 53.34,87.63 | 68.23,81.26 69.83,79.66 69.83,78 | 54.61,129.54 54.61,135.89 62.23,135.89 63.36,134.76 | 63.36,134.76 R1.1 | 63.36,134.76 61.95,133.35 57.15,133.35 57.15,130.81 60.96,130.81
N$19
  Top 2.286: 116.59,39.37 119.38,42.16 119.38,43.18 120.65,43.18 120.65,41.91 120.4,41.91 | 116.59,39.37 Q4,G,D,S.1 113.03,38.73 113.03,38.1 111.76,38.1 111.76,39.37 | 116.59,39.37 116.59,31.75 115.06,30.23 114.81,30.23 112.52,27.94 112.52,28.45 111.76,29.21 110.49,27.94 111.76,26.67 113.03,26.67 113.03,27.3 GATEFOR4.1 107.95,27.94 104.14,24.13 104.14,17.78 106.05,15.88 | R4.1 120.4,41.91 | 106.05,15.88 106.68,15.24 | 106.68,15.24 118.11,15.24 121.92,19.05 | 121.92,19.05 123.19,20.32 123.19,24.13 116.84,30.48 111.76,25.4 110.49,25.4 109.22,26.67 106.05,23.5 | 106.05,23.5 105.41,22.86 105.41,15.24 106.68,15.24 | 106.05,15.88 106.68,16.51 116.84,16.51 120.65,20.32 120.65,24.13 | 120.65,24.13 116.84,27.94 115.57,27.94 111.76,24.13 109.22,24.13 107.95,22.86 107.95,20.32 106.68,19.05 107.95,17.78 114.3,17.78 115.57,19.05 116.84,19.05 | 116.84,17.78 116.84,19.05 | 116.84,19.05 118.11,20.32 119.38,20.32 119.38,22.86 115.57,26.67 113.03,24.13 113.03,22.86 110.49,22.86 109.22,21.59 109.22,19.05 114.3,19.05 118.11,22.86 116.84,24.13 | 116.84,24.13 116.2,24.77 114.3,22.86 114.3,21.59 110.49,21.59 110.49,20.32 114.3,20.32 116.84,22.86 116.84,24.13 | 106.05,23.5 106.68,22.86 106.68,20.32 | 120.65,24.13 121.92,22.86 121.92,19.05 | 120.4,41.91 121.67,43.18 130.81,43.18 | 130.81,43.18 133.35,43.18 133.35,39.37 127,39.37 120.02,32.38 | 120.02,32.38 119.38,31.75 118.11,31.75 118.11,38.1 121.92,41.91 129.54,41.91 130.81,40.64 132.08,41.91 130.81,43.18 | 120.02,32.38 119.38,33.02 119.38,38.1 121.92,38.1 | 121.92,38.1 121.92,39.37 123.19,40.64 128.27,40.64 128.27,35.56
  Top 2.286: 128.27,35.56 128.27,34.29 125.73,34.29 124.46,35.56 125.09,36.2 125.73,35.56 124.46,34.29 123.19,34.29 121.28,36.2 | 121.28,36.2 120.65,36.83 121.92,38.1 | 123.19,38.1 121.92,38.1 | 123.19,38.1 124.46,39.37 128.27,35.56 | 121.28,36.2 121.28,34.92 120.65,34.29 | 123.19,38.1 121.92,36.83
  Top 3.556: 113.03,38.1 113.03,36.83 113.15,36.71 114.82,36.71 116.98,34.55 116.98,31.49 115.77,30.28